# Altium PCB Buck Converter.PcbDoc
Units mil, origin at the board's own origin, x right, y up, seen from the top; angles counter-clockwise.
Board outline 2078.35 x 1643.57 mil, 4 copper layers (Top Layer, L2 - GND, L3 - POWER, Bottom Layer), stack 23.756 mil thick; 39 components, 21 nets, 105 pads, 107 vias.
Unrouted connection lines stored in the file: 7.
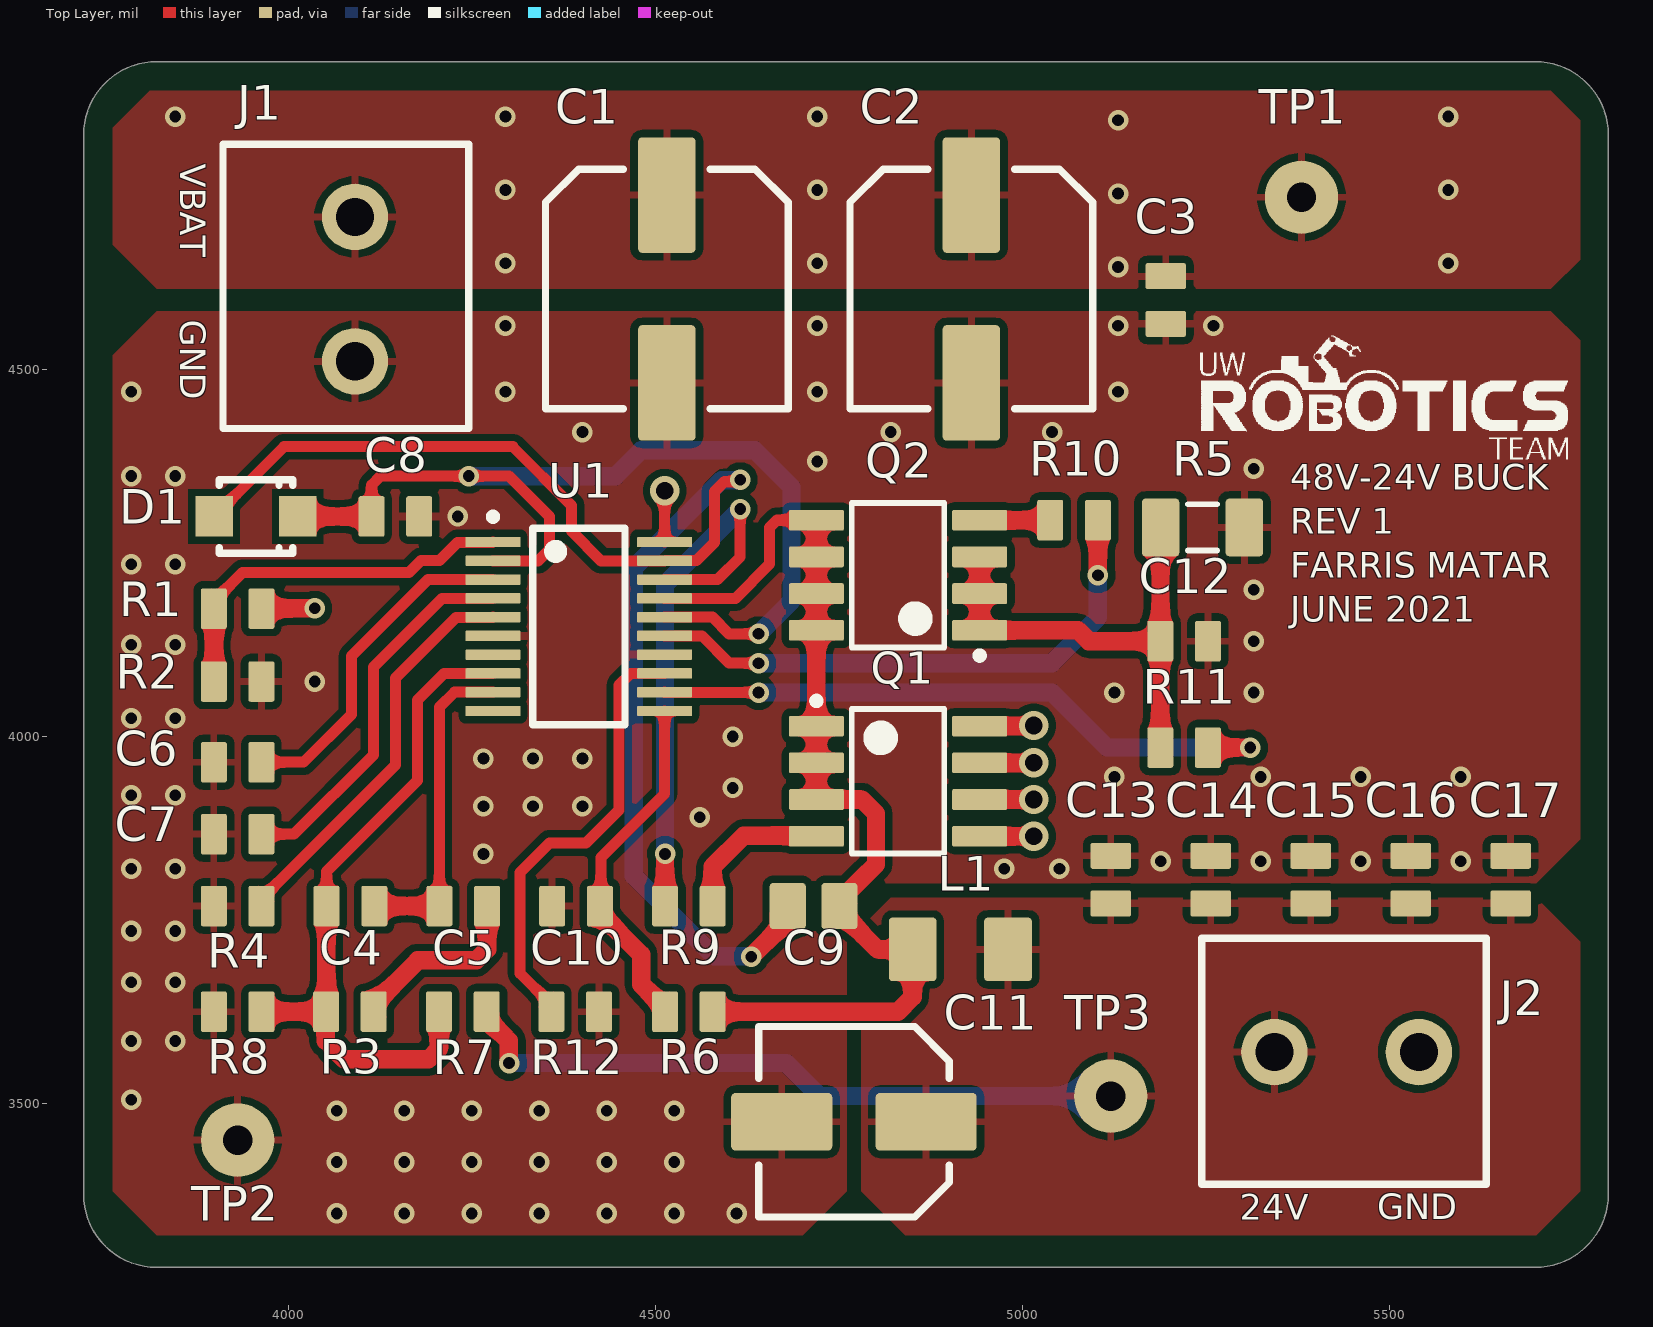
[diagram p0: Top Layer view]
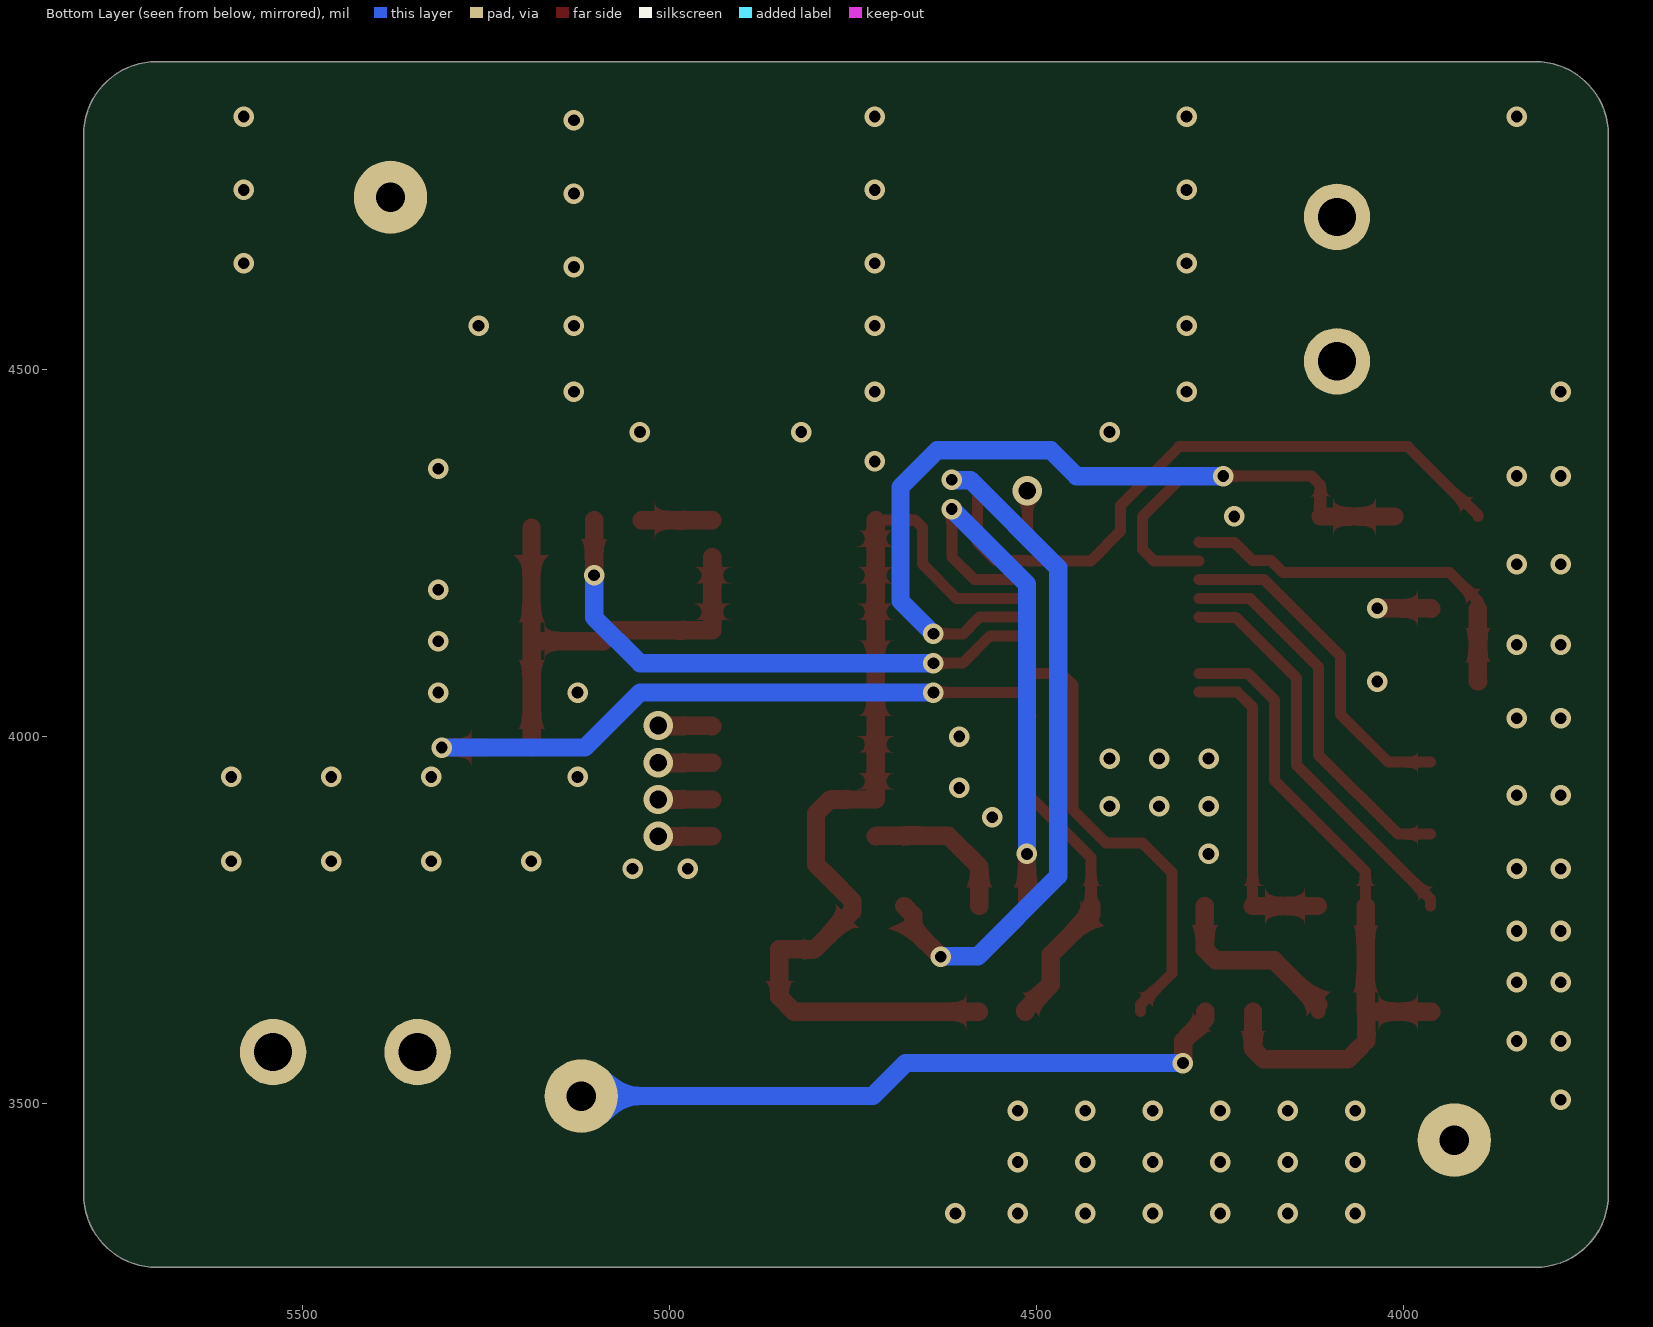
[diagram p1: Bottom Layer view, seen from below]
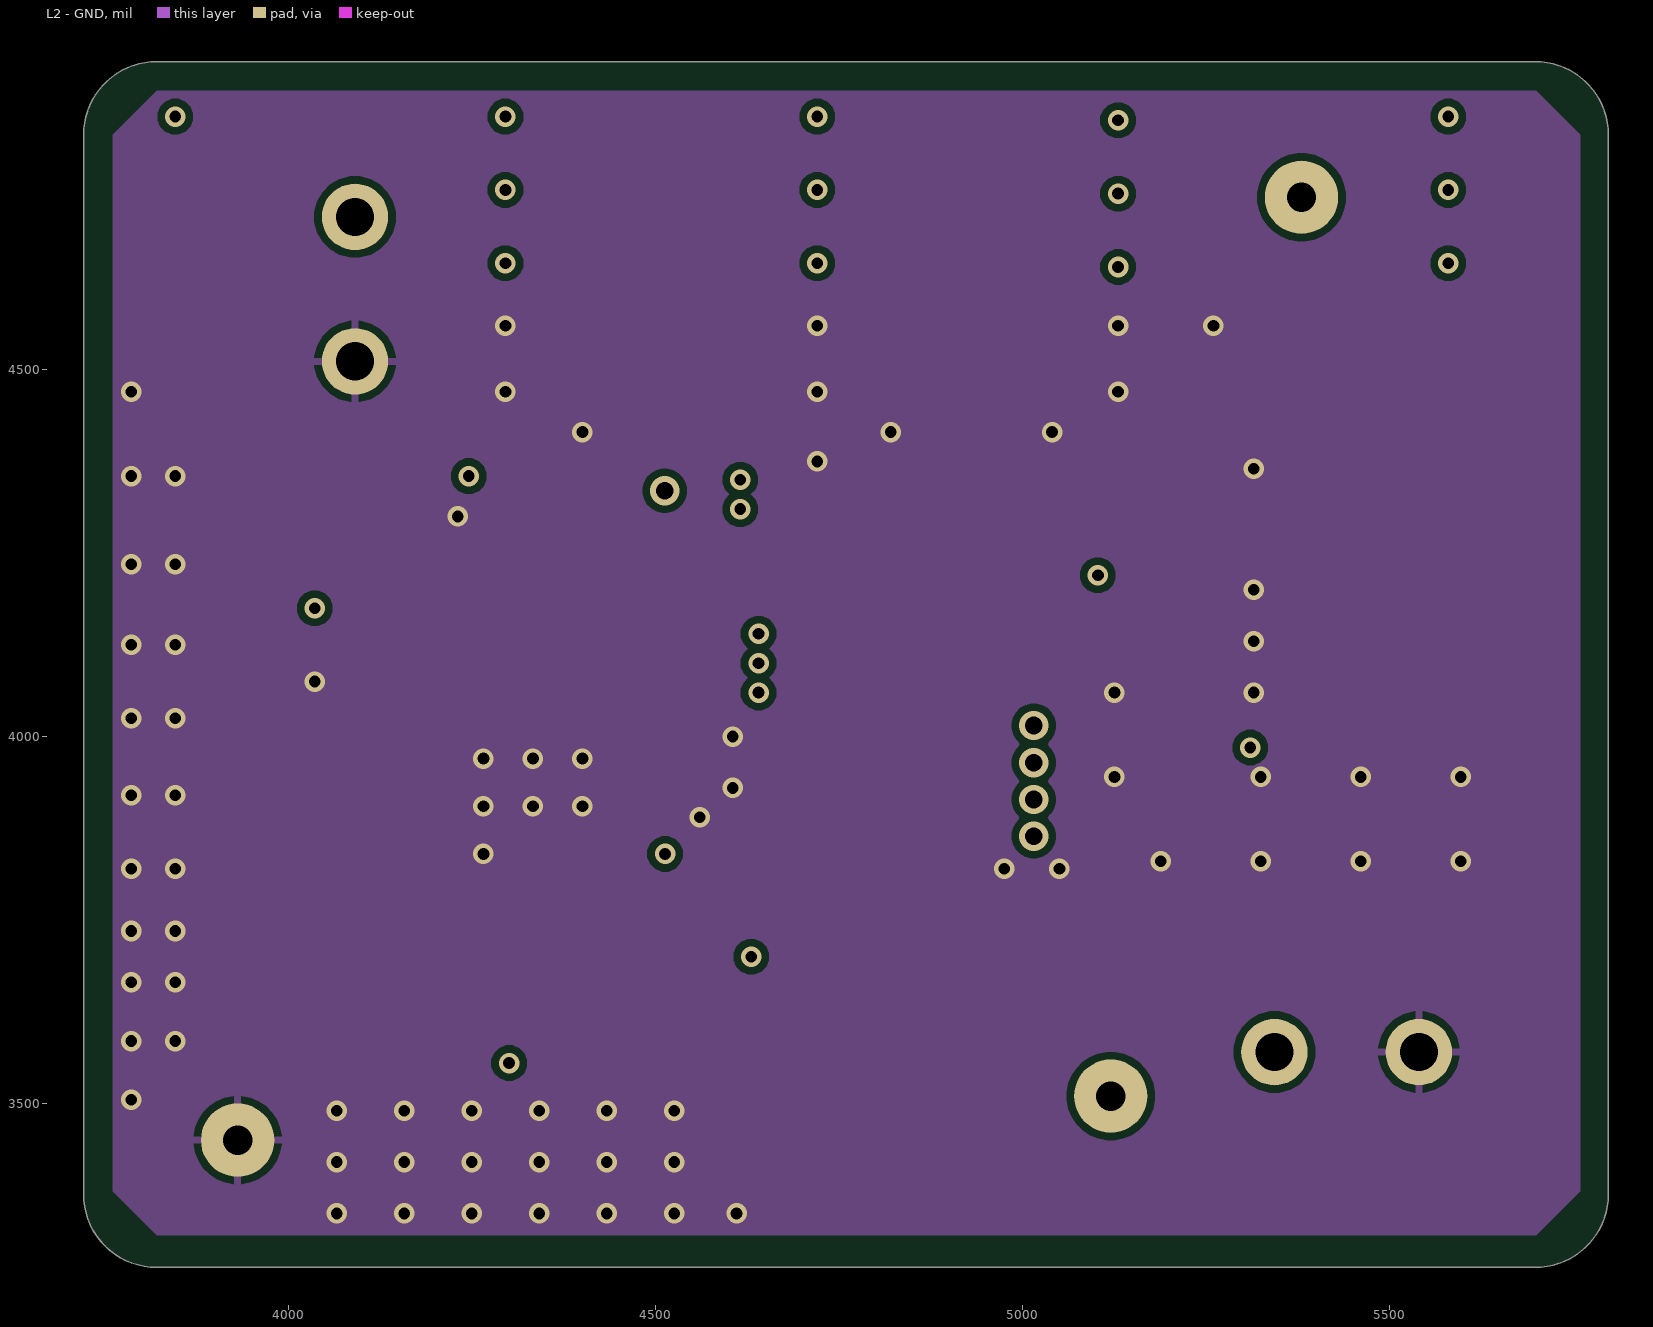
[diagram p2: L2 - GND]
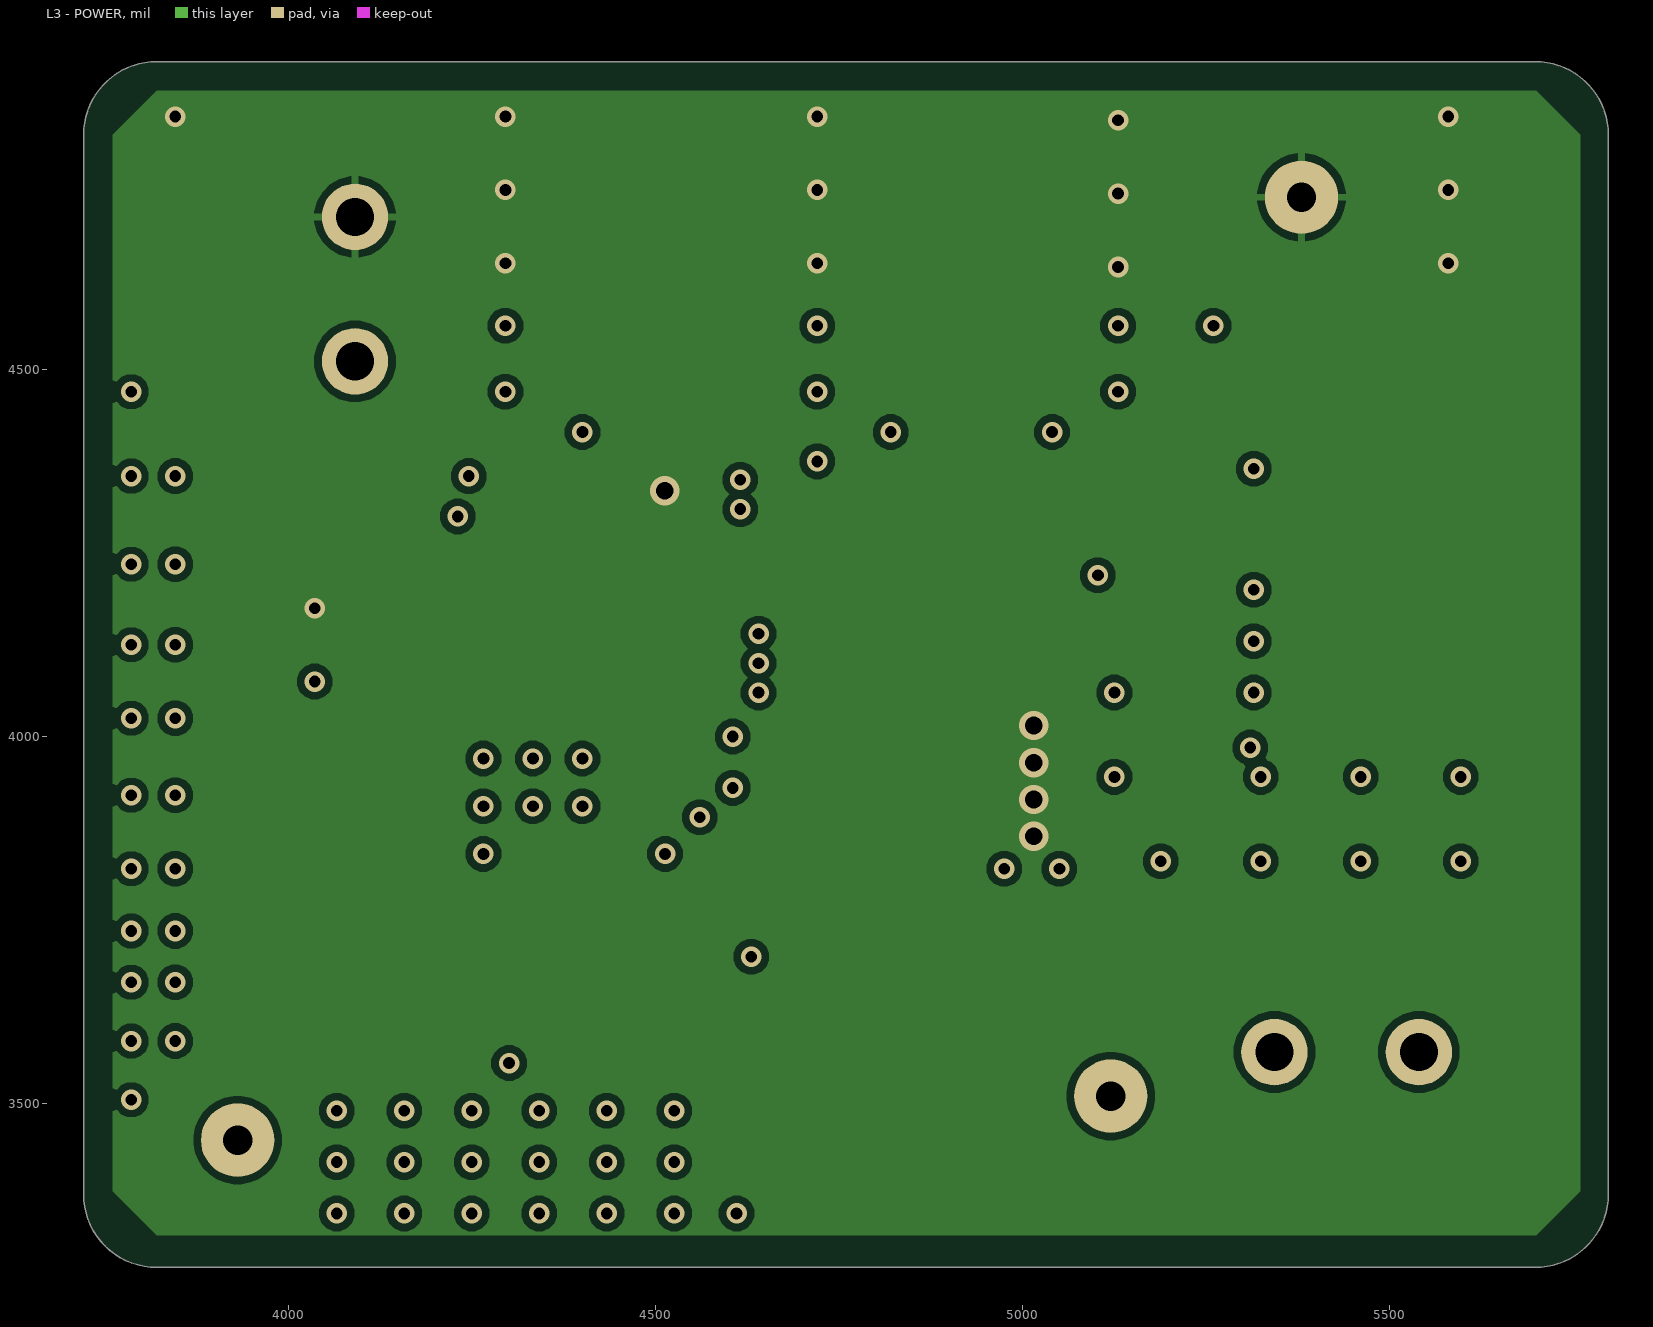
[diagram p3: L3 - POWER]
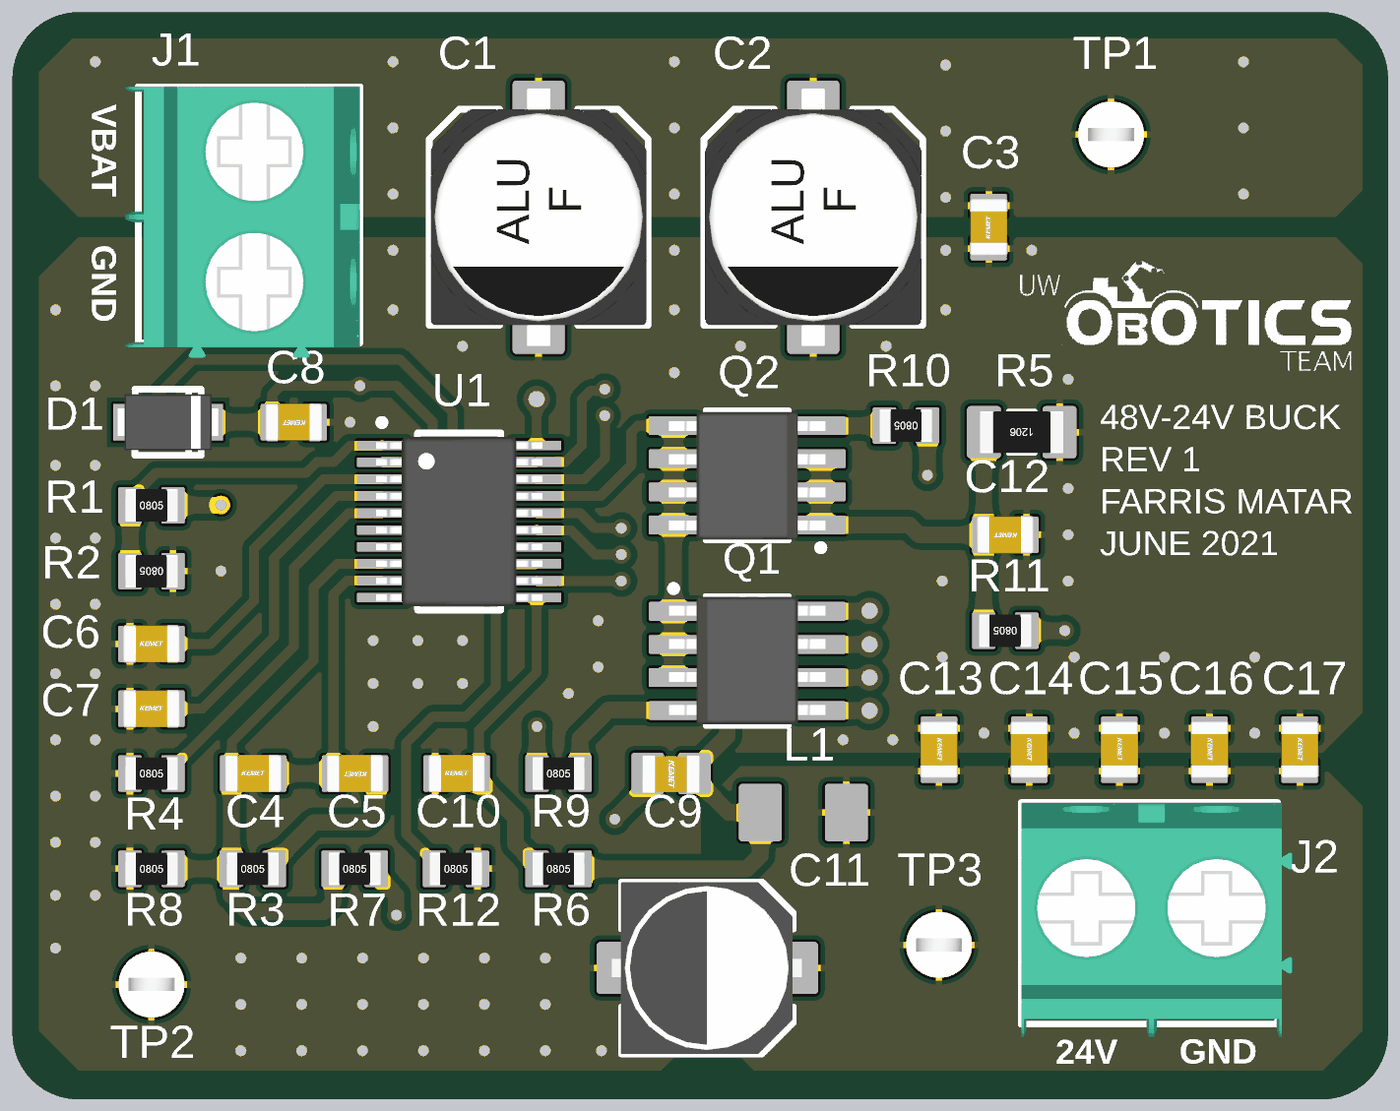
[diagram p4: 3D render of the assembled board from above, using the file's embedded part models]

## Layer stack, top to bottom
Top Solder: solder mask 0.4, Solder Resist, Dk 3.5
Top Layer: signal copper 1.4
Dielectric 2: prepreg 2.8, PP-006, Dk 4.1
L2 - GND: signal copper 1.378
Dielectric 1: dielectric 12.6, FR-4, Dk 4.8
L3 - POWER: signal copper 1.378
Dielectric 3: prepreg 2.8, PP-006, Dk 4.1
Bottom Layer: signal copper 1.4
Bottom Solder: solder mask 0.4, Solder Resist, Dk 3.5

## Board outline
3720,3376.45 ccw(c3820.01,3376.45) 3820.01,3276.43 5698.35,3276.43 ccw(c5698.35,3376.43) 5798.35,3376.43 5798.35,4820 ccw(c5698.35,4820) 5698.35,4920 3820,4920 ccw(c3820,4820) 3720,4820

## Design rules (kind name [scope] priority, off if disabled: settings)
Clearance [All] p1: gap=10 ignorepadtopadclearanceinfootprint=FALSE except(0: Arc-Hole Track-Hole SMDPad-Hole THPad-Hole Via-Hole Fill-Hole Poly-Hole Region-Hole Text-Hole)
PolygonConnect [All] p1: thpad.connectstyle=Relief thpad.reliefconductorwidth=10 thpad.reliefentries=4 thpad.polygonreliefangle="90 Angle" thpad.airgapwidth=10 smdpad.connectstyle=Relief smdpad.reliefconductorwidth=10 smdpad.reliefentries=4 smdpad.polygonreliefangle="90 Angle" smdpad.airgapwidth=10 via.connectstyle=Direct via.reliefconductorwidth=10 via.reliefentries=4 via.polygonreliefangle="90 Angle" via.airgapwidth=10
RoomDefinition "Buck Converter" [InComponentClass('Buck Converter')] p1: confinementstyle=ConfineIn formatcopy=TRUE lockcomponents=FALSE outline 3575,3160 5960,3160 5960,5000 3575,5000
RoutingVias [All] p1: holewidth=28 width=50 viastyle="Through Hole" minholewidth=28 minwidth=50 maxholewidth=28 maxwidth=50
SolderMaskExpansion [All] p1: expansion=4 istentingtop=FALSE
Width [All] p1: maxlimit=50 minlimit=10 preferedwidth=10 midlayer1_maxwidth=10 midlayer2_maxwidth=10 minimp=50.000000 maximp=50.000000 favimp=50.000000
30 further rules are at their usual default settings.

## Components (designator, comment, footprint, x,y, rotation, side; value= is the part's Value field where it differs from the comment)
C1 "CAP_22uF_80V_ALUM" RADIAL_PANASONIC_F 4515,4610 r180 top value=22µF
C2 "CAP_22uF_80V_ALUM" RADIAL_PANASONIC_F 4930,4610 r180 top value=22µF
C3 "CAP_0.1uF_100V_0805" CAP0805 5195,4595 r90 top value=0.1µF
C4 "CAP_150pF_16V_0805" CAP0805 4083.75,3769 r0 top value=150pF
C5 "CAP_330pF_50V_0805" CAP0805 4237.5,3769 r180 top value=330pF
C6 "CAP_0.47uF_25V_0805" CAP0805 3930,3965 r0 top value=0.47µF
C7 "CAP_0.015uF_50V_0805" CAP0805 3930,3867 r0 top value=0.015µF
C8 "CAP_0.47uF_25V_0805" CAP0805 4145,4300 r180 top value=0.47µF
C9 "CAP_0.22uF_100V_0805" CAP2012 4715,3769 r180 top value=0.22μF
C10 "CAP_820pF_50V_0805" CAP0805 4391.25,3769 r0 top value=820pF
C11 "CAP_100uF_35V_ALUM" RADIAL_CORNELL_D 4770,3475 r90 top value=100µF
C12 "CAP_NU_0805" CAP0805 5220,4130 r180 top value=NU
C13 "CAP_NU_0805" CAP0805 5120,3805 r270 top value=NU
C14 "CAP_NU_0805" CAP0805 5256.25,3805 r270 top value=NU
C15 "CAP_NU_0805" CAP0805 5392.5,3805 r270 top value=NU
C16 "CAP_NU_0805" CAP0805 5528.75,3805 r270 top value=NU
C17 "CAP_NU_0805" CAP0805 5665,3805 r270 top value=NU
D1 "DIO_SCHOTTKY_100V_150mA" SOD-123_FLAT 3955,4300 r180 top
J1 "CON_2POS_SCREW_TERM" 1935161 4090,4609.8 r270 top
J2 "CON_2POS_SCREW_TERM" 1935161 5441.57,3570 r0 top
L1 "IND_47uH_13.0A" IND_SIGNAL_SCIHP0412-R047 4915,3710 r180 top
Q1 "NMOS_100V_10.3A" 8-SOIC_NMOS 4830.15,3940 r0 top
Q2 "NMOS_100V_10.3A" 8-SOIC_NMOS 4830,4219 r180 top
R1 "RES_54.9kΩ_0805_1%" RES0805 3930,4174.34 r0 top value=54.9kΩ
R2 "RES_2.32kΩ_0805_1%" RES0805 3930,4075 r180 top value=2.32kΩ
R3 "RES_133kΩ_0805_1%" RES0805 4083.01,3625 r0 top value=133kΩ
R4 "RES_12.1kΩ_0805_1%" RES0805 3930,3769 r0 top value=12.1kΩ
R5 "RES_0.015Ω_1206_1%" RES1206 5245,4285 r180 top value=0.015Ω
R6 "RES_267kΩ_0805_1%" RES0805 4545,3625 r0 top value=267kΩ
R7 "RES_34.8kΩ_0805_1%" RES0805 4237.01,3625 r0 top value=34.8kΩ
R8 "RES_1.2kΩ_0805" RES0805 3930,3625 r0 top value=1.2kΩ
R9 "RES_0Ω_0805" RES0805 4545,3769 r0 top value=0Ω
R10 "RES_0Ω_0805" RES0805 5070,4295 r180 top value=0Ω
R11 "RES_0Ω_0805" RES0805 5220,3985 r180 top value=0Ω
R12 "RES_0Ω_0805" RES0805 4390,3625 r0 top value=0Ω
TP1 "TESTPOINT_LOOP" TESTPOINT_LOOP 5380,4735 r0 top
TP2 "TESTPOINT_LOOP" TESTPOINT_LOOP 3930,3450 r0 top
TP3 "TESTPOINT_LOOP" TESTPOINT_LOOP 5120,3510 r0 top
U1 "BUCK_LM5117PWP" HTSSOP 4395,4150 r0 top

## Footprints (in the part's own frame and the unit in brackets; to place one, negate y for a bottom-side part, rotate by r counter-clockwise, add the part's x,y. Pads: shape width x height; smd on the part's side, far side on the other; paste and mask are expansions set on the pad)
8-SOIC_NMOS [mm]
  rrect15% 1.9x0.72 smd: 1(-2.827,-1.926) 2(-2.827,-0.656) 2(-2.827,0.614) 2(-2.827,1.884) 3(2.823,-1.926) 3(2.823,-0.656) 3(2.823,0.614) 3(2.823,1.884)
  silkscreen extent -2.95,-2.52 1.6,2.88, body extent -3,-2.45 3,2.45, height 1.63
1935161 [mm] "TERM BLK 2POS SIDE ENTRY 5MM PCB"
  round 2.3 hole 1.325: 1(-2.5,0) 2(2.5,0)
  silkscreen extent -5.01,-4.57 4.83,3.94, body extent -5.01,-5.06 5.39,3.94, height 11.41
CAP0805 [mm] "Chip Capacitor, Body 2.0x1.2mm, Height 0.45mm, IPC Medium Density"
  rrect15% 0.9x1.4 smd: 1(-0.825,0) 2(0.825,0)
  body extent -1.1,-0.73 1.1,0.73, height 1.39
CAP2012 [mm]
  rrect20% 1.25x1.6 smd: 1(-0.895,0) 2(0.895,0)
  body extent -1.1,-0.7 1.1,0.75, height 1.41
HTSSOP [mm]
  rrect15% 1.9x0.36 smd: 1(-2.97,2.925) 2(-2.97,2.275) 3(-2.97,1.625) 4(-2.97,0.975) 5(-2.97,0.325) 6(-2.97,-0.325) 7(-2.97,-0.975) 8(-2.97,-1.625) 9(-2.97,-2.275) 10(-2.97,-2.925) 11(2.97,-2.925) 12(2.97,-2.275) 13(2.97,-1.625) 14(2.97,-0.975) 15(2.97,-0.325) 16(2.97,0.325) 17(2.97,0.975) 18(2.97,1.625) 19(2.97,2.275) 20(2.97,2.925)
  silkscreen extent -3.09,-3.4 1.6,3.92, body extent -3.2,-3.25 3.2,3.25, height 1.1
IND_SIGNAL_SCIHP0412-R047 [mm]
  rrect15% 1.65x2.2 smd: 1(-1.65,0) 2(1.65,0)
RADIAL_CORNELL_D [mm] "Size D radial surface mount capacitor"
  rrect15% 2x3.5 smd: 1(0,-2.5) 2(0,2.5)
  silkscreen extent -3.3,-3.3 3.3,3.3, body extent -3.3,-3.62 3.3,3.67, height 5.9
RADIAL_PANASONIC_F [mm]
  rrect15% 2x4 smd: 1(0,-3.25) 2(0,3.25)
  silkscreen extent -4.2,-4.15 4.2,4.15, body extent -4.15,-4.95 4.15,4.95, height 10.2
RES0805 [mm] "Chip Resistor, 2-Leads, Body 2.00x1.25mm, IPC High Density"
  rrect15% 0.9x1.4 smd: 1(-0.825,0) 2(0.825,0)
  body extent -1,-0.62 1,0.63, height 0.61
RES1206 [mm] "Chip Resistor, Body 3.2x1.6mm, IPC Medium Density"
  rrect20% 1.3x2 smd: 1(-1.45,0) 2(1.45,0)
  silkscreen extent -0.5,-0.8 0.5,0.8, body extent -1.6,-0.8 1.6,0.8, height 0.61
SOD-123_FLAT [mm]
  rect 1.3x1.4 smd: 1(-1.45,0) 2(1.45,0)
  silkscreen extent -1.27,-1.27 1.27,1.27, body extent -1.93,-1.08 1.92,1.08, height 1.35
TESTPOINT_LOOP [mm]
  round 2.54 hole 1.02: 1(0,0)
  body extent -1.27,-1.27 1.27,1.27, height 4.57

## Part data
C1 C2: "CAP ALUM POLY 22UF 20% 80V SMD", Manufacturer 1="Panasonic Electronic Components", Manufacturer Part Number 1=EEH-ZA1K220P, Package/Footprint=SMD, Supplier Part Number 1=P122641CT-ND, Voltage Rating=80V, Mounting Type=SMD, Supplier 1=Digi-Key
C3: "CAP CER 0.1UF 100V X7R 0805", Manufacturer 1="TDK Corporation", Manufacturer Part Number 1=C2012X7R2A104K125AA, Package/Footprint=0805, Supplier Part Number 1=445-1418-1-ND, Voltage Rating=100V, Supplier 1=Digi-Key
C4: "CAP CER 150PF 16V X7R 0805", Manufacturer 1="Würth Elektronik", Manufacturer Part Number 1=885012207028, Package/Footprint=0805, Supplier Part Number 1=732-8028-1-ND, Voltage Rating=16V, Supplier 1=Digi-Key
C5: "CAP CER 330PF 50V C0G/NPO 0805", Manufacturer 1=Yageo, Manufacturer Part Number 1=CC0805JRNPO9BN331, Package/Footprint=0805, Supplier Part Number 1=311-1117-1-ND, Voltage Rating=50V, Supplier 1=Digi-Key
C6 C8: "CAP CER 0.47UF 25V X5R 0805", Manufacturer 1=KEMET, Manufacturer Part Number 1=C0805C474K3PAC7800, Package/Footprint=0805, Supplier Part Number 1=399-15508-1-ND, Voltage Rating=25V, Supplier 1=Digi-Key
C7: "CAP CER 0.015UF 50V C0G 0805", Manufacturer 1="TDK Corporation", Manufacturer Part Number 1=CGA4F2C0G1H153J085AA, Package/Footprint=0805, Supplier Part Number 1=445-6948-1-ND, Voltage Rating=50V, Supplier 1=Digi-Key
C9: "CAP CER 0.22UF 100V X7R 0805", Dielectric=X7R, Manufacturer 1="Taiyo Yuden", Manufacturer Part Number 1=HMJ212BB7224KGHT, Package/Footprint=0805, Supplier Part Number 1=587-4221-1-ND, Voltage Rating=100V, Mounting Type=SMD, Supplier 1=Digi-Key
C10: "CAP CER 820PF 50V C0G/NP0 0805", Manufacturer 1=KEMET, Manufacturer Part Number 1=C0805X821J5GAC7800, Package/Footprint=0805, Supplier Part Number 1=399-19481-1-ND, Voltage Rating=50V, Supplier 1=Digi-Key
C11: "CAP ALUM 100UF 20% 35V SMD", Manufacturer 1=Nichicon, Manufacturer Part Number 1=UWD1V101MCL1GS, Package/Footprint=SMD, Supplier Part Number 1=493-9685-1-ND, Voltage Rating=35V, Mounting Type=SMD, Supplier 1=Digi-Key
C12 C13 C14 C15 C16 C17: "PLACEHOLDER CAPACITOR 0805", Package/Footprint=0805, Mounting Type=SMD
D1: "DIODE SCHOTTKY 100V 150MA SOD123", Manufacturer 1="Comchip Technology", Manufacturer Part Number 1=CDBW46-G, Package/Footprint=SOD-123, Supplier Part Number 1=641-1964-1-ND, Mounting Type=SMD, Supplier 1=Digi-Key, Vr (Max)=100V
J1 J2: "TERM BLK 2POS SIDE ENTRY 5MM", Manufacturer 1="Phoenix Contact", Manufacturer Part Number 1=1935161, Package/Footprint=SMD, Supplier Part Number 1=277-1667-ND, Mounting Type=TH, Supplier 1=Digi-Key
L1: "FIXED IND 47NH 13A SMD", Current Rating=13A, DC Resistance (DCR)=3.75mR, Inductance=47μH, Inductance Tolerance=20%, Manufacturer 1="Signal Transformer", Manufacturer Part Number 1=SCIHP0412-R047, Saturation Current=32A, Supplier Part Number 1=595-1757-1-ND, Test Frequency=200kHz, Mounting Type=SMD, Supplier 1=Digi-Key
Q1 Q2: "MOSFET N-CH 100V 10.3A 8SOIC", Manufacturer 1="Vishay Siliconix", Manufacturer Part Number 1=SI4058DY-T1-GE3, Package/Footprint=8-SOIC, Supplier Part Number 1=SI4058DY-T1-GE3CT-ND, Id=10.3A, Supplier 1=Digi-Key, Vdss=100V, Vgs (Max)=±20V
R1: "RES SMD 54.9K OHM 1% 1/8W 0805", Manufacturer 1="Vishay Dale", Manufacturer Part Number 1=CRCW080554K9FKEA, Package/Footprint=0805, Supplier Part Number 1=541-54.9KCCT-ND, Supplier 1=Digi-Key
R2: "RES 2.32K OHM 1% 1/4W 0805", Manufacturer 1="Stackpole Electronics Inc", Manufacturer Part Number 1=RNCP0805FTD2K32, Package/Footprint=0805, Supplier Part Number 1=RNCP0805FTD2K32CT-ND, Supplier 1=Digi-Key
R3: "RES SMD 133K OHM 1% 1/8W 0805", Manufacturer 1=Yageo, Manufacturer Part Number 1=RC0805FR-07133KL, Package/Footprint=0805, Supplier Part Number 1=311-133KCRCT-ND, Supplier 1=Digi-Key
R4: "RES 12.1K OHM 1% 1/4W 0805", Manufacturer 1="Stackpole Electronics Inc", Manufacturer Part Number 1=RNCP0805FTD12K1, Package/Footprint=0805, Supplier Part Number 1=RNCP0805FTD12K1CT-ND, Supplier 1=Digi-Key
R5: "RES 0.015 OHM 1% 1/2W 1206", Manufacturer 1="Stackpole Electronics Inc", Manufacturer Part Number 1=CSR1206FK15L0, Package/Footprint=1206, Supplier Part Number 1=CSR1206FK15L0CT-ND, Supplier 1=Digi-Key
R6: "RES SMD 267K OHM 1% 1/8W 0805", Manufacturer 1=Yageo, Manufacturer Part Number 1=RC0603FR-071K2L, Package/Footprint=0805, Supplier Part Number 1=311-267KCRCT-ND, Supplier 1=Digi-Key
R7: "RES 34.8K OHM 1% 1/8W 0805", Manufacturer 1="Stackpole Electronics Inc", Manufacturer Part Number 1=RMCF0805FT34K8, Package/Footprint=0805, Supplier Part Number 1=RMCF0805FT34K8CT-ND, Supplier 1=Digi-Key
R8: library part RES_1.2kΩ_0805_1%, "RES SMD 1.2K OHM 1% 1/8W 0805", Manufacturer 1="Samsung Electro-Mechanics", Manufacturer Part Number 1=RC2012F122CS, Package/Footprint=0805, Supplier Part Number 1=1276-5275-2-ND, Supplier 1=Digi-Key
R9 R10 R11 R12: "RES 0 OHM JUMPER 1/8W 0805", LCSC Part #=C17477, Manufacturer 1="Panasonic Electronic Components", Manufacturer Part Number 1=ERJ-6GEY0R00V, Package/Footprint=0805, Supplier Part Number 1=P0.0ACT-ND, Mounting Type=SMD, Supplier 1=Digi-Key
TP1 TP2 TP3: "TESTPOINT THRUHOLE", Manufacturer 1="Keystone Electronics", Manufacturer Part Number 1=5002, Package/Footprint=TH, Supplier Part Number 1=36-5002-ND, Mounting Type=TH, Supplier 1=Digi-Key
U1: "IC REG CTRLR BUCK 20TSSOP", Manufacturer 1="Texas Instruments", Manufacturer Part Number 1=LM5117PMH/NOPB, Package/Footprint=20-HTSSOP, Supplier Part Number 1=296-41310-1-ND, Mounting Type=SMD, Supplier 1=Digi-Key

## Via types
v1: diameter 28, hole 16, Top Layer to Bottom Layer, tented both sides, 101 vias
v2: diameter 40, hole 24, Top Layer to Bottom Layer, tented both sides, 5 vias
v3: diameter 28, hole 16, Top Layer to Bottom Layer, 1 vias

## Nets (pads, with @x,y where several pads share a name; then routed paths per layer and width w, separated by ;. In a path a pad name is that pad's centre, name@x,y a point inside that pad or via, vN(x,y) a via of type N, cw(c..) or ccw(c..) an arc to the next point about the centre after c; other vN are vias at no path point)
24V: C11.1 C13.2 C14.2 C15.2 C16.2 C17.2 J2.1 L1.1 R7.2 TP3.1 | length 921.3
  Top Layer w25: R7.2 4269.49,3615.16 4299.43,3585.22 4299.43,3555.57 v1(4300,3555)
  Bottom Layer w25: v1(4300,3555) 4677.76,3555 4722.76,3510 TP3.1
GND: C1.2 C2.2 C3.1 C6.1 C7.1 C8.1 C10.1 C11.2 C12.1 C13.1 C14.1 C15.1 C16.1 C17.1 J1.2 J2.2 R2.1 R4.1 R5.1 R8.1 R12.2 TP2.1 U1.6 U1.14
  other v1: 4065,3350 4157,3350 4249,3350 4341,3350 4433,3350 4525,3350 4610,3350 4065,3420 4157,3420 4249,3420 4341,3420 4433,3420 4525,3420 4065,3490 4157,3490 4249,3490 4341,3490 4433,3490 4525,3490 3785,3505 3785,3585 3845,3585 3785,3665 3845,3665 3785,3735 3845,3735 3785,3820 3845,3820 4975,3820 5050,3820 5188,3830 5324.33,3830 5460.67,3830 5597,3830 4265,3840 4560,3890 4265,3905 4332.5,3905 4400,3905 3785,3920 3845,3920 4605,3930 5125,3945 5324.33,3945 5460.67,3945 5597,3945 4265,3970 4332.5,3970 4400,3970 4605,4000 3785,4025 3845,4025 5125,4060 5315,4060 4035,4075 3785,4125 3845,4125 5315,4130 5315,4200 3785,4235 3845,4235 4230,4300 3785,4355 3845,4355 5315,4365 4720,4375 4400,4415 4820,4415 5040,4415 3785,4470 4295,4470 4720,4470 5130,4470 4295,4560 4720,4560 5130,4560 5260,4560
NetC4_1: C4.1 R3.1 R7.1 R8.2 U1.8 | length 945.2
  Top Layer w15: C4.1@4050.9,3768.63 C4.1 4051.27,3816.27 4175,3940 4175,4050 4211.02,4086.02 U1.8
  Top Layer w20: 4050,3585 4058.25,3576.75 ; R3.1@4050,3624.47 R3.1 R3.1@4050.9,3625.37
  Top Layer w25: R8.2@3961.5,3625 R3.1 ; 4050,3585 R3.1@4050,3624.47 ; R3.1@4050.9,3625.37 C4.1@4050.9,3768.63 ; 4058.25,3576.75 4075,3560 4190,3560 4204.53,3574.53 R7.1
NetC4_2: C4.2 C5.2 U1.9 | length 441.3
  Top Layer w15: C5.2 4205,4040 4225.43,4060.43 U1.9
  Top Layer w25: C4.2 C5.2
NetC5_1: C5.1 R3.2 | length 254.5
  Top Layer w20: R3.2 R3.2@4115.49,3634.84
  Top Layer w25: R3.2@4115.49,3634.84 4175.65,3695 4255,3695 4270,3710 C5.1
NetC6_2: C6.2 U1.3 | length 465.4
  Top Layer w15: C6.2 4020,3965 4085,4030 4085,4109.64 4189.33,4213.98 U1.3
NetC7_2: C7.2 U1.4 | length 519
  Top Layer w15: C7.2 4007,3867 4115,3975 4115,4095 4208.39,4188.39 U1.4
NetC8_2: C8.2 D1.1 U1.2 U1.16 | length 1373.1
  Top Layer w15: C8.2 4112.52,4342.52 4125,4355 v1(4245,4355) 4300,4355 4355,4300 4355,4255 4339.57,4239.57 U1.2 ; U1.16 4577.2,4162.8 4600,4140 v1(4640,4140)
  Top Layer w25: D1.1 C8.2
  Bottom Layer w25: v1(4245,4355) 4445,4355 4480,4390 4635,4390 4685,4340 4685,4185 v1(4640,4140)
NetC9_1: C9.1 L1.2 Q1.2 Q2.3 R6.2 U1.17 | length 1370.4
  Top Layer w15: U1.17 4608.39,4188.39 4655,4235 4655,4285 4665,4295 4718.68,4295 Q2.3@4718.86,4294.82
  Top Layer w25: R6.2@4577.99,3625 4830,3625 4850,3645 L1.2 L1.2 4802.35,3710 4750.24,3762.11 C9.1 4750.24,3775.89 4780.68,3806.33 4800,3825.65 4800,3895 4780.82,3914.18 4718.86,3914.18 4718.86,3964.18 4718.86,4014.18 4718.86,4144.82 4718.86,4194.82 4718.86,4244.82 Q2.3@4718.86,4294.82
NetC9_2: C9.2 D1.2 U1.19 | length 1838.9
  Top Layer w15: D1.2 3897.91,4301.97 3916,4320.06 3917.97,4320.06 3992.91,4395 4305,4395 4385,4315 4385,4280 4425.43,4239.57 U1.19 4512.34,4239.98 4555.37,4239.98 4580,4264.61 4580,4334.23 4593.29,4347.51 4612.51,4347.51 v1(4615,4350)
  Top Layer w25: v1(4630,3700) 4667.66,3737.66 4667.66,3756.89 C9.2
  Bottom Layer w25: v1(4615,4350) 4614.43,4349.43 4589.43,4349.43 4470,4230 4470,3810 4579.43,3700.57 4629.43,3700.57 v1(4630,3700)
NetC10_2: C10.2 R6.1 U1.11 | length 483.1
  Top Layer w15: C10.2@4425,3770.27 4425,3835 4511.93,3921.93 U1.11
  Top Layer w25: C10.2@4425,3770.27 4425,3757.89 4480,3702.89 4480,3661.97 4515,3626.97 R6.1@4515,3625
NetC12_2: C12.2 Q2.2 R5.2 R11.2 | length 652.5
  Top Layer w25: Q2.2@4941.3,4244.82 4941.3,4194.82 4941.3,4144.82 5075.18,4144.82 5090,4130 C12.2 ; R11.2 C12.2 ; R5.2 5187.72,4284.8 5187.72,4130.2 C12.2
NetQ1_1: Q1.1 R9.2 | length 212.8
  Top Layer w25: R9.2 4577.48,3822.48 4620,3865 4718.04,3865 Q1.1
NetQ2_1: Q2.1 R10.2 | length 96.3
  Top Layer w25: Q2.1 4941.39,4294.91 5037.43,4294.91 R10.2
NetR1_1: R1.1 R2.2 U1.1 | length 523.3
  Top Layer w15: R1.1@3898.01,4173.84 3898.01,4184.67 3936.86,4223.52 4163.52,4223.52 4180,4240 4205,4240 4229.74,4264.74 4277.66,4264.74 U1.1
  Top Layer w25: R2.2 3898.01,4075.49 R1.1@3898.01,4173.84
NetR4_2: R4.2 U1.5 | length 554
  Top Layer w15: R4.2 3962.48,3778.84 4145,3961.36 4145,4080 4227.38,4162.38 4277.66,4162.38 U1.5
NetR9_1: R9.1 U1.18 | length 764.4
  Top Layer w15: U1.18 4583.98,4213.98 4615,4245 v1(4615,4310)
  Top Layer w25: R9.1 v1(4512.52,3840)
  Bottom Layer w25: v1(4512.52,3840) 4512.52,4207.52 v1(4615,4310)
NetR10_1: R10.1 U1.15 | length 764.4
  Top Layer w15: U1.15 4512.34,4136.79 4563.21,4136.79 4600,4100 v1(4640,4100)
  Top Layer w25: v1(5102.48,4220) R10.1
  Bottom Layer w25: v1(4640,4100) 5040,4100 5102.48,4162.48 v1(5102.48,4220)
NetR11_1: R11.1 U1.12 | length 886.8
  Top Layer w15: U1.12 4512.15,4060.22 4639.78,4060.22 v1(4640,4060)
  Top Layer w25: R11.1 v1(5310,3985)
  Bottom Layer w25: v1(4640,4060) 5040,4060 5115,3985 v1(5310,3985)
NetR12_1: R12.1 U1.13 | length 616.4
  Top Layer w15: R12.1 4357.52,3634.84 4315,3677.36 4315,3815 4355,3855 4405,3855 4450,3900 4450,4070 4465.61,4085.61 4511.52,4085.61 U1.13
VBAT: C1.1 C2.1 C3.2 J1.1 Q1.3 R1.2 TP1.1 U1.20 | length 438.8
  Top Layer w15: U1.20 v2(4511.93,4335)
  Top Layer w25: R1.2@3961.5,4174.34 3961.83,4174.67 4034.67,4174.67 v3(4035,4175) ; Q1.3@4941.3,3864.18 v2(5015,3864.18) ; Q1.3@4941.3,3914.18 v2(5015,3914.18) ; Q1.3@4941.3,3964.18 v2(5015,3964.18) ; Q1.3@4941.3,4014.18 4941.71,4014.59 5014.59,4014.59 v2(5015,4015)
  other v1: 5130,4640 4295,4645 4720,4645 5580,4645 5130,4740 4295,4745 4720,4745 5580,4745 5130,4840 3845,4845 4295,4845 4720,4845 5580,4845
pads on no net: U1.7 U1.10

## Polygon pours and split planes (outlines as drawn)
GND on Top Layer "GND_L01_P02" (solid, pour order 9): 3760,4520 3820,4580 5720,4580 5760,4540 5760,3860 5700,3800 4800,3800 4760,3760 4760,3380 4700,3320 3820,3320 3760,3380
24V on Top Layer "24V_L01_P03" (solid, pour order 4): 4780,3740 4820,3780 5700,3780 5760,3720 5760,3380 5700,3320 4840,3320 4780,3380
VBAT on Top Layer "VBAT_L01_P01" (solid, pour order 0): 3760,4830 3760,4670 3820,4610 5720,4610 5760,4650 5760,4840 5720,4880 3810,4880
VBAT on L3 - POWER "VBAT_L03_P05" (solid, pour order 7): 3820,4880 5700,4880 5760,4820 5760,3380 5700,3320 3820,3320 3760,3380 3760,4820
GND on L2 - GND "GND_L02_P04" (solid, pour order 5): 3760,4820 3820,4880 5700,4880 5760,4820 5760,3380 5700,3320 3820,3320 3760,3380

## Silkscreen, mask and mechanical layers (free items; w line width, h text height)
Top Overlay:
  drawing of 16 lines, arcs and shapes, not listed
  text "VBAT" at 3840,4780.71 h60 r270
  text "GND" at 3840,4568.37 h60 r270
  text "48V-24V BUCK / REV 1 / FARRIS MATAR / JUNE 2021" at 5365,4145 h60
  text "GND" at 5483,3330.72 h60
  text "24V" at 5296.06,3330 h60
Mechanical 1:
  lines w10: 3720,3376.45 ccw(c3720.01,3376.45) 3720.01,3376.43 ; 3720.01,3376.43 ccw(c3820.01,3376.43) 3820.01,3276.43 ; 3720,3376.45 3720,4820 cw(c3820,4820) 3820,4920 5698.35,4920 cw(c5698.35,4820) 5798.35,4820 5798.35,3376.43 cw(c5698.35,3376.43) 5698.35,3276.43 3820.01,3276.43 ; 3820.01,3276.43 ccw(c3820.01,3276.43) 3820.01,3276.43